# Altium PCB pwr_switch.PcbDoc
Units mm, origin at the board's own origin, x right, y up, seen from the top; angles counter-clockwise.
Board outline 22.86 x 18.16 mm, 2 copper layers (Top Layer, Bottom Layer); 16 components, 9 nets, 40 pads, 15 vias.
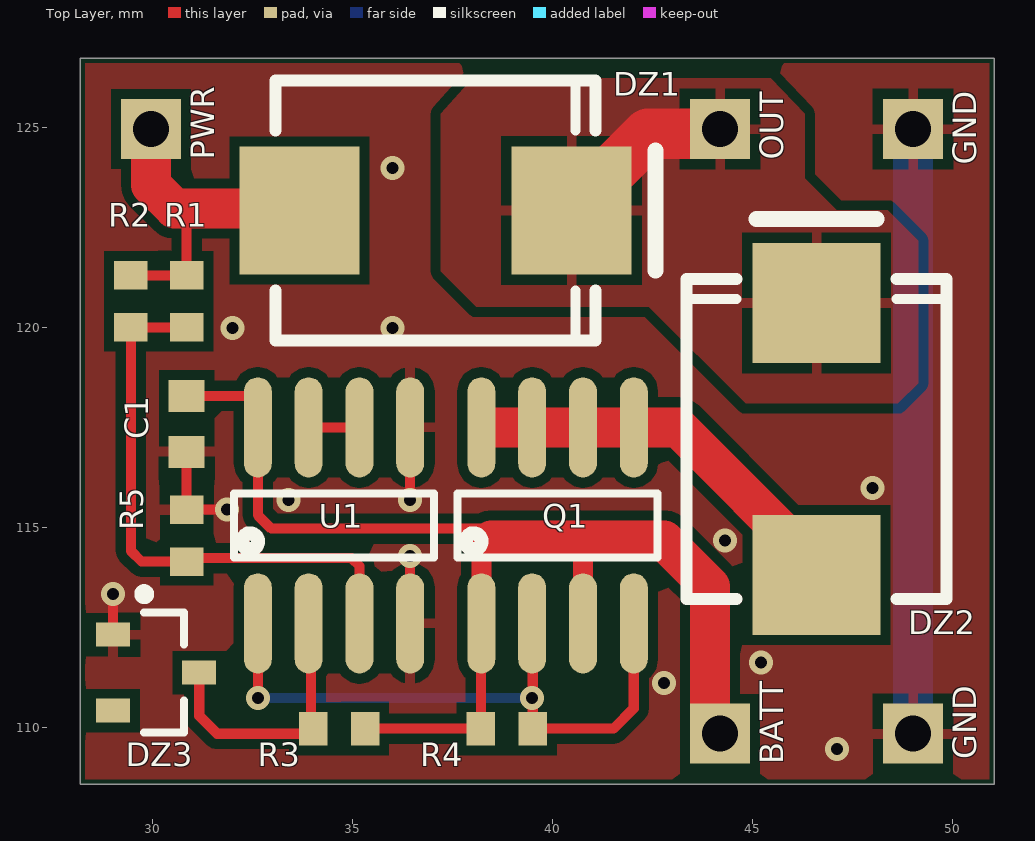
[diagram p0: Top Layer view]
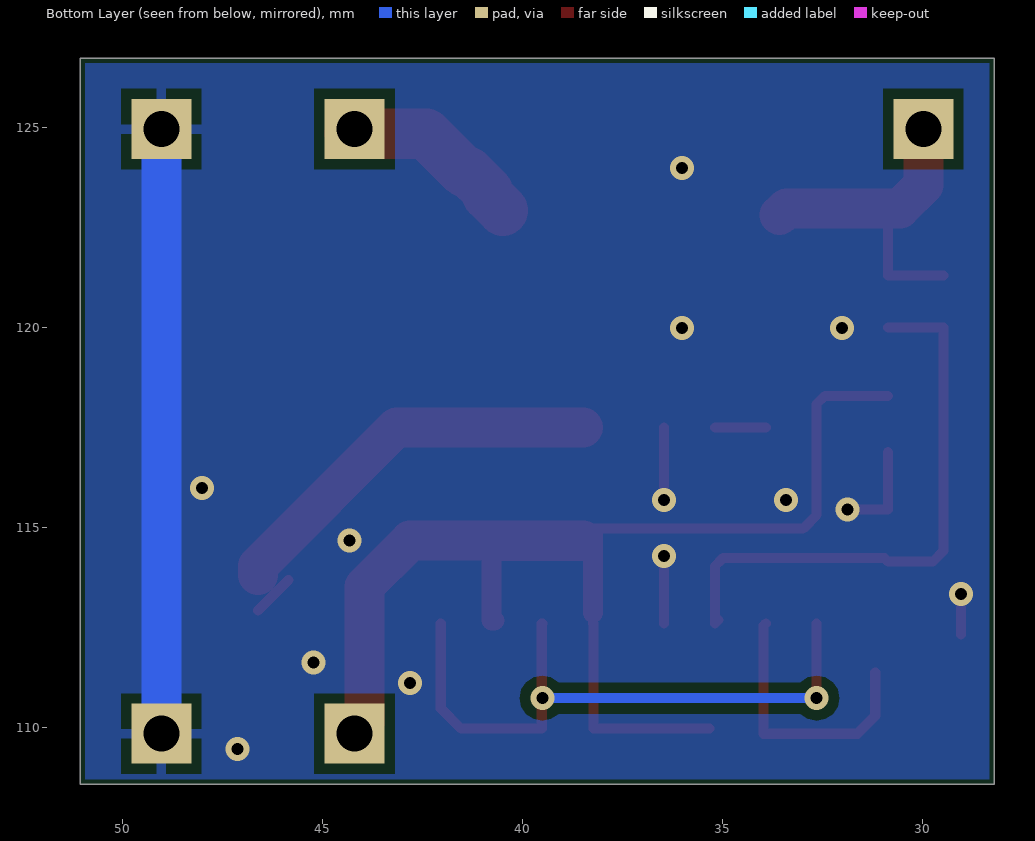
[diagram p1: Bottom Layer view, seen from below]
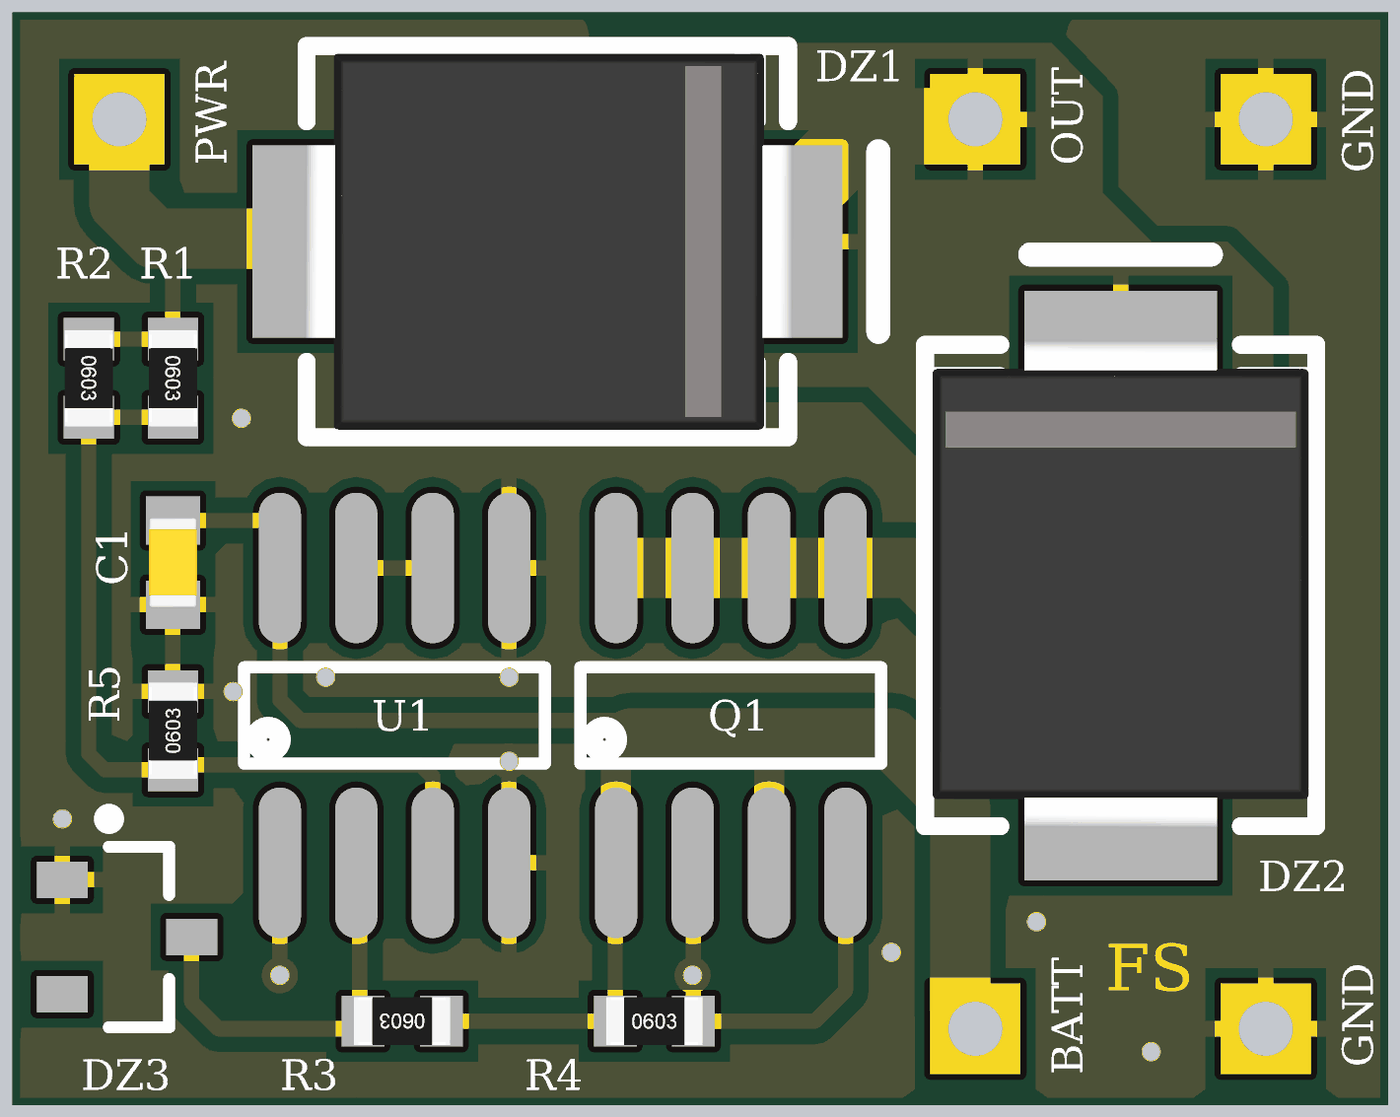
[diagram p2: 3D render of the assembled board from above, using the file's embedded part models]

## Layer stack, top to bottom
Top Solder: solder mask 0.0102, Solder Resist, Dk 3.5
Top Layer: signal copper 0.0356
Dielectric 1: dielectric 0.32, FR-4, Dk 4.8
Bottom Layer: signal copper 0.0356
Bottom Solder: solder mask 0.0102, Solder Resist, Dk 3.5

## Board outline
28.194,108.585 51.054,108.585 51.054,126.746 28.194,126.746

## Design rules (kind name [scope] priority, off if disabled: settings)
Clearance [All] p1: gap=0.254 ignorepadtopadclearanceinfootprint=FALSE except(0: Arc-Hole Track-Hole SMDPad-Hole THPad-Hole Via-Hole Fill-Hole Poly-Hole Region-Hole Text-Hole)
PolygonConnect PolygonConnect_1 [IsVia] p1: connectstyle=Direct reliefconductorwidth=0.254 reliefentries=4 polygonreliefangle="90 Angle" airgapwidth=0.254
PolygonConnect [All] p2: connectstyle=Relief reliefconductorwidth=0.254 reliefentries=4 polygonreliefangle="90 Angle" airgapwidth=0.254
RoutingVias [All] p1: holewidth=0.3 width=0.6 viastyle="Through Hole" minholewidth=0.3 minwidth=0.6 maxholewidth=5 maxwidth=5
SilkToSolderMaskClearance [IsPad] p1: minsilkscreentomaskgap=0.2 clearancetoexposedcopper=TRUE
SolderMaskExpansion [All] p1: expansion=0.102
Width [All] p1: maxlimit=10 minlimit=0.12 preferedwidth=0.254
29 further rules are at their usual default settings.

## Classes and differential pairs
component class pwr_switch: BATT C1 DZ1 DZ2 DZ3 GND OUT PWR Q1 R1 R2 R3 R5 U1

## Components (designator, comment, footprint, x,y, rotation, side; value= is the part's Value field where it differs from the comment)
BATT "" PIN1 44.196,109.855 r90 top (schematic designator IN_BATT1)
C1 "100nF" 0603_[1608] 30.861,117.602 r90 top
DZ1 "B540C" DO214AB_K1-A2_SMC 37.084,122.936 r180 top
DZ2 "B540C" DO214AB_K1-A2_SMC 46.609,117.221 r270 top
DZ3 "BZX84C3V3" SOT-23_L 30.099,111.379 r0 top
GND "" PIN1 49.022,124.968 r0 top (schematic designator GND2)
GND "" PIN1 49.022,109.855 r0 top (schematic designator GND1)
OUT "" PIN1 44.196,124.968 r0 top (schematic designator OUT1)
PWR "" PIN1 29.972,124.968 r90 top (schematic designator IN_PWR1)
Q1 "IRF9362" SOIC8 40.132,115.062 r90 top
R1 "330K" 0603_[1608]_RES_SMALL 30.861,120.665 r90 top
R2 "27K" 0603_[1608]_RES_SMALL 29.464,120.665 r90 top
R3 "10K" 0603_[1608]_RES_SMALL 34.671,109.982 r0 top
R4 "10K" 0603_[1608]_RES_SMALL 38.862,109.982 r180 top
R5 "10K" 0603_[1608]_RES_SMALL 30.861,114.808 r270 top
U1 "LM393" SOIC8 34.544,115.062 r90 top

## Footprints (in the part's own frame and the unit in brackets; to place one, negate y for a bottom-side part, rotate by r counter-clockwise, add the part's x,y. Pads: shape width x height; smd on the part's side, far side on the other; paste and mask are expansions set on the pad)
0603_[1608] [mm] "Chip Capacitor, Body 1.6x0.8mm, IPC High Density"
  rect 0.8x0.9 smd: 1(-0.7,0) 2(0.7,0)
  body extent -0.75,-0.4 0.75,0.4, height 0.67
0603_[1608]_RES_SMALL [mil] "Chip Capacitor, Body 1.6x0.8mm, IPC High Density"
  rect 28x33 smd: 1(-25.59,0) 2(25.59,0)
  body extent -31,-16 31,16, height 18
DO214AB_K1-A2_SMC [mm]
  rect 3x3.2 smd: 1(-3.4,0) 2(3.4,0)
  silkscreen extent -5.5,-3.25 4,3.25, body extent -4.1,-3.12 4.05,3.13, height 2.65
PIN1 [mm] "Generic Antenna; 1 Lead"
  rect 1.5x1.5 hole 0.9: 1(0,0)
SOIC8 [mm] "SOIC, 8-Leads, Body 4.9x3.8mm, Pitch 1.27mm, IPC Low Density"
  oval 2.5x0.7 smd: 1(-2.45,1.905) 2(-2.45,0.635) 3(-2.45,-0.635) 4(-2.45,-1.905) 5(2.45,-1.905) 6(2.45,-0.635) 7(2.45,0.635) 8(2.45,1.905)
  silkscreen extent -0.8,-2.5 0.8,2.5, body extent -2,-2.5 2,2.5, height 1.75
SOT-23_L [mm] "SOT23, 3-Leads, Body 2.9x1.3mm, Pitch 0.95mm, Lead Span 2.5mm, IPC High Density"
  rect 0.85x0.6 smd: 1(-1.075,0.95) 2(-1.075,-0.95) 3(1.075,0)
  silkscreen extent -0.42,-1.5 0.7,2.09, body extent -0.7,-1.5 0.7,1.5, height 1.1

## Part data
BATT GND GND OUT PWR: library part Test_point
C1: library part Cap, "Capacitor", Published=8-Jun-2000, Publisher="Altium Limited", Revision="July-2002: Re-released for DXP Platform."
DZ1 DZ2: library part "D Schottky", "Diode Schottky (SSC54)", Code_JEDEC=DO-214-AA, LatestRevisionDate=17-Jul-2002, LatestRevisionNote="Re-released for DXP Platform.", PackageDescription="DO-214-AA/SMB; 2 C-Bend Leads; Body 5.3 x 3.6 mm, inc. leads (LxW)", PackageReference=SMB, Published=8-Jun-2000, Publisher="Altium Limited"
DZ3: library part ZENER_BZX, "Zener 0.35W"
Q1: library part "MOSFET-P dual", "Dual channel P-MOS in same package"
R1 R2 R3 R4 R5: library part Res1, "Resistor", Revision="July-2002: Re-released for DXP Platform."
U1: library part LM2903DG, "Low Offset Voltage Dual Comparators, 2 to 36 V, -40 to 105 degC, 8-Pin SOIC, Pb-Free, Tube", Manufacturer="On Semiconductor", ComponentLink1Description="Manufacturer URL", ComponentLink1URL=http://www.onsemi.com/, ComponentLink2Description=Datasheet, ComponentLink2URL=http://www.onsemi.com/pub_link/Collateral/LM393-D.PDF, ComponentLink3Description="Package Specification", ComponentLink3URL=http://www.onsemi.com/pub_link/Collateral/751-07.PDF, DatasheetVersion="Rev. 25", ICC Typ (mA)=0.4, IO Typ (mA)=16, Mounting Technology="Surface Mount", PackageDescription="8-Pin Small Outline Integrated Circuit, Body 4.9 x 3.9 mm, Pitch 1.27 mm", PackageReference=SOIC-8-751-07, PackageVersion="Rev. AK, 02/2011", Packing=Tube, PartNumber=LM2903DG, RoHS=TRUE, VCC Max (V)=36, VCC Min (V)=2

## Via types
v1: diameter 0.6, hole 0.3, Top Layer to Bottom Layer, tented both sides, 15 vias

## Nets (pads, with @x,y where several pads share a name; then routed paths per layer and width w, separated by ;. In a path a pad name is that pad's centre, name@x,y a point inside that pad or via, vN(x,y) a via of type N, cw(c..) or ccw(c..) an arc to the next point about the centre after c; other vN are vias at no path point)
+BATT: BATT.1 C1.2 Q1.1 Q1.3 R3.2 R4.2 U1.8 | length 33.2
  Top Layer w0.25: C1.2 32.431,118.302 32.639,118.094 U1.8 32.639,115.316 32.976,114.979 38.945,114.979 39.243,114.681 ; R3.2 R4.2 38.212,112.612 Q1.1
  Top Layer w0.254: Q1.3@40.697,112.682 Q1.3
  Top Layer w0.5: Q1.1@38.227,112.866 38.227,114.427 ; 38.227,114.808 38.227,114.427 ; Q1.3@40.697,112.682 40.767,112.682 40.767,114.427 38.227,114.427
  Top Layer w1: 38.481,114.681 39.243,114.681 42.799,114.681 43.942,113.538 43.942,110.109 BATT.1
GND: C1.1 DZ3.1 GND.1 R5.1 U1.4 U1.5 | length 22.1
  Top Layer w0.25: DZ3.1 v1(29.024,113.343) ; C1.1 R5.1 v1(31.862,115.458) ; U1.4 v1(36.449,114.3) ; v1(36.449,115.697) U1.5
  Bottom Layer w1: GND.1@49.022,109.855 GND.1@49.022,124.968
  other v1: 47.117,109.474 42.799,111.125 45.212,111.633 44.323,114.681 33.401,115.697 48,116 32,120 36,120 36,124
NetDZ1_1: DZ1.1 DZ2.1 OUT.1 | length 4.8
  Top Layer w1.27: DZ1.1 40.865,123.317 40.865,123.417 41.349,123.901 41.449,123.901 42.401,124.853 44.081,124.853 OUT.1 OUT.1@44.311,124.853
NetDZ1_2: DZ1.2 PWR.1 R1.2 R2.2 | length 9
  Top Layer w0.25: R2.2 R1.2 30.861,122.682 30.558,122.985
  Top Layer w0.254: PWR.1@29.591,124.587 PWR.1
  Top Layer w1: PWR.1 29.972,123.571 30.558,122.985 33.396,122.985 DZ1.2@33.564,122.816
NetDZ2_2: DZ2.2 Q1.5 Q1.6 Q1.7 Q1.8 | length 10.9
  Top Layer w0.254: DZ2.2@45.847,113.694 DZ2.2@46.609,112.932
  Top Layer w1: Q1.8@38.481,117.512 Q1.7 Q1.6 Q1.5 43.143,117.512 46.609,114.046 DZ2.2
NetDZ3_3: DZ3.3 R3.1 U1.2 | length 6.8
  Top Layer w0.254: DZ3.3 31.174,110.304 31.623,109.855 33.965,109.855 33.965,112.556 U1.2
NetQ1_2: Q1.2 Q1.4 R4.1 U1.1 | length 16.2
  Top Layer w0.254: v1(32.639,110.744) U1.1 ; Q1.2 39.512,112.612 R4.1 41.529,109.982 42.037,110.49 Q1.4
  Bottom Layer w0.254: v1(32.639,110.744) v1(39.497,110.744)
NetR1_1: R1.1 R2.1 R5.2 U1.3 | length 14.5
  Top Layer w0.25: R1.1 R2.1 29.464,114.427 29.733,114.158 R5.2 30.944,114.241 34.984,114.241 35.179,114.046 U1.3 U1.3@35.093,112.698
NetU1_6: U1.6 U1.7 | length 1.3
  Top Layer w0.25: U1.7 U1.6
pads on no net: DZ3.2

## Polygon pours and split planes (outlines as drawn)
GND on Bottom Layer "GND_L02_P007" (solid, remove dead copper, pour order 7): 28.321,126.619 50.927,126.619 50.927,108.712 28.321,108.712
GND on Top Layer "GND_L01_P006" (solid, remove dead copper, pour order 6): 28.321,126.619 50.927,126.619 50.927,108.712 28.321,108.712
NetDZ1_1 on Top Layer "NETDZ1_1_L01_P005" (solid, remove dead copper, pour order 5): 38.009,126.238 45.466,126.238 46.313,125.349 46.313,123.74 47.117,122.936 48.387,122.936 49.149,122.174 49.149,118.618 48.641,118.11 44.831,118.11 42.418,120.523 38.1,120.523 37.211,121.412 37.211,125.349

## Silkscreen, mask and mechanical layers (free items; w line width, h text height)
Top Solder:
  text "FS" at 46.355,110.49 h1.52
Bottom Solder:
  text "FS" at 47.498,110.49 h1.52
Mechanical 1:
  the board outline again, w0.254
Mechanical 15:
  the board outline again, w0.254

## Text inside footprints (layer, text, board x,y; h text height)
DZ1: Mechanical 5 "K" at 41.234,123.236 h1 r180
DZ2: Mechanical 5 "K" at 46.309,121.371 h1 r270